# EAGLE board Oscilloscope (EAGLE 9.7.0)

Size 214.47 x 126.41 mm. Coordinates in mm from the lower left corner, seen from the top.
Outline: 0,0 214.47,0 214.47,126.41 0,126.41 0,0
Copper layers (1*16): Top 0.035mm / dielectric 1.5mm / Bottom 0.035mm
Design rules "default": minimum track width 6mil, minimum drill 0.35mm, track to track 6mil, track to pad 6mil, pad to pad 6mil, via to via 6mil, smd to smd 6mil, copper to edge 40mil, drill to drill 6mil, minimum pad ring 10mil, minimum via ring 8mil, stop-mask expansion 4mil, vias tented up to drill 0mil, thermal gap 10mil

## Footprints (pad centres in the part's own frame; a part is rotated, then mirrored left to right if it is on the bottom)
BATTERY-GENERIC = drill 1.118 pad 3.15 octagon: + 2.54,0; - -2.54,0
HA-06-SM065 = drill 1 pad 1.676: 1 -2.54,-2.54; 2 0,2.54; 3 2.54,-2.54
ARDUINO-UNO-R3-SHIELD = drill 1.016 pad 1.88: 3.3V 24.13,-2.54; 5V 24.13,0; A0 24.13,12.7; A1 24.13,15.24; A2 24.13,17.78; A3 24.13,20.32; A4 24.13,22.86; A5 24.13,25.4; AREF -24.13,-13.97; D2 -24.13,20.32; D3 -24.13,17.78; D4 -24.13,15.24; D5 -24.13,12.7; D6 -24.13,10.16; D7 -24.13,7.62; D8 -24.13,3.81; D9 -24.13,1.27; D10 -24.13,-1.27; D11 -24.13,-3.81; D12 -24.13,-6.35; D13 -24.13,-8.89; GND@0 24.13,2.54; GND@1 24.13,5.08; GND@2 -24.13,-11.43; IOREF 24.13,-7.62; NC 24.13,-10.16; RES 24.13,-5.08; RX -24.13,25.4; SCL -24.13,-19.05; SDA -24.13,-16.51; TX -24.13,22.86; VIN 24.13,7.62
LCD-I2C = drill 1.016 long: 1 -19.05,-5.08; 2 -19.05,-7.62; 3 -19.05,-10.16; 4 -19.05,-12.7

## Placement (x,y rotation side)
FUNC1  FUNCTION-GENERATOR  [BATTERY-GENERIC]  8.26,8.26 180 top
RPOT1  250k  [HA-06-SM065]  155.67,23.7 0 top
U1  ARDUINO-UNO-R3-SHIELD  [ARDUINO-UNO-R3-SHIELD]  77.02,37.78 270 top
U2  LCD-16X2-I2CSUNFOUNDER-IIC  [LCD-I2C]  158.75,118.87 0 top
U3  LCD-16X2-I2CSUNFOUNDER-IIC  [LCD-I2C]  158.85,87.31 0 top

## Library data of the parts
FUNC1 RPOT1 U1-U3 = Tinkercad

## Nets
FUNC1+: FUNC1.+ U1.A0
FUNC1-: FUNC1.- RPOT1.3 U1.GND@0 U1.GND@1 U1.GND@2 U2.1 U3.1
U1_5V: RPOT1.1 U1.5V U2.2 U3.2
U1_A1: RPOT1.2 U1.A1
U1_A4: U1.A4 U2.3 U3.3
U1_A5: U1.A5 U2.4 U3.4

## Tracks (layer width: path | path; a pad name or v marks a point on that pad's centre or on a via)
FUNC1+  (1 unrouted)
FUNC1-  (6 unrouted)
U1_5V  (3 unrouted)
U1_A1  (1 unrouted)
U1_A4  (2 unrouted)
U1_A5  (2 unrouted)